# Altium PCB 8x8.PcbDoc
Units mm, origin at the board's own origin, x right, y up, seen from the top; angles counter-clockwise.
Board outline 77 x 77 mm, 2 copper layers (Top Layer, Bottom Layer); 164 components, 209 nets, 584 pads, 0 vias.
Unrouted connection lines stored in the file: 383.
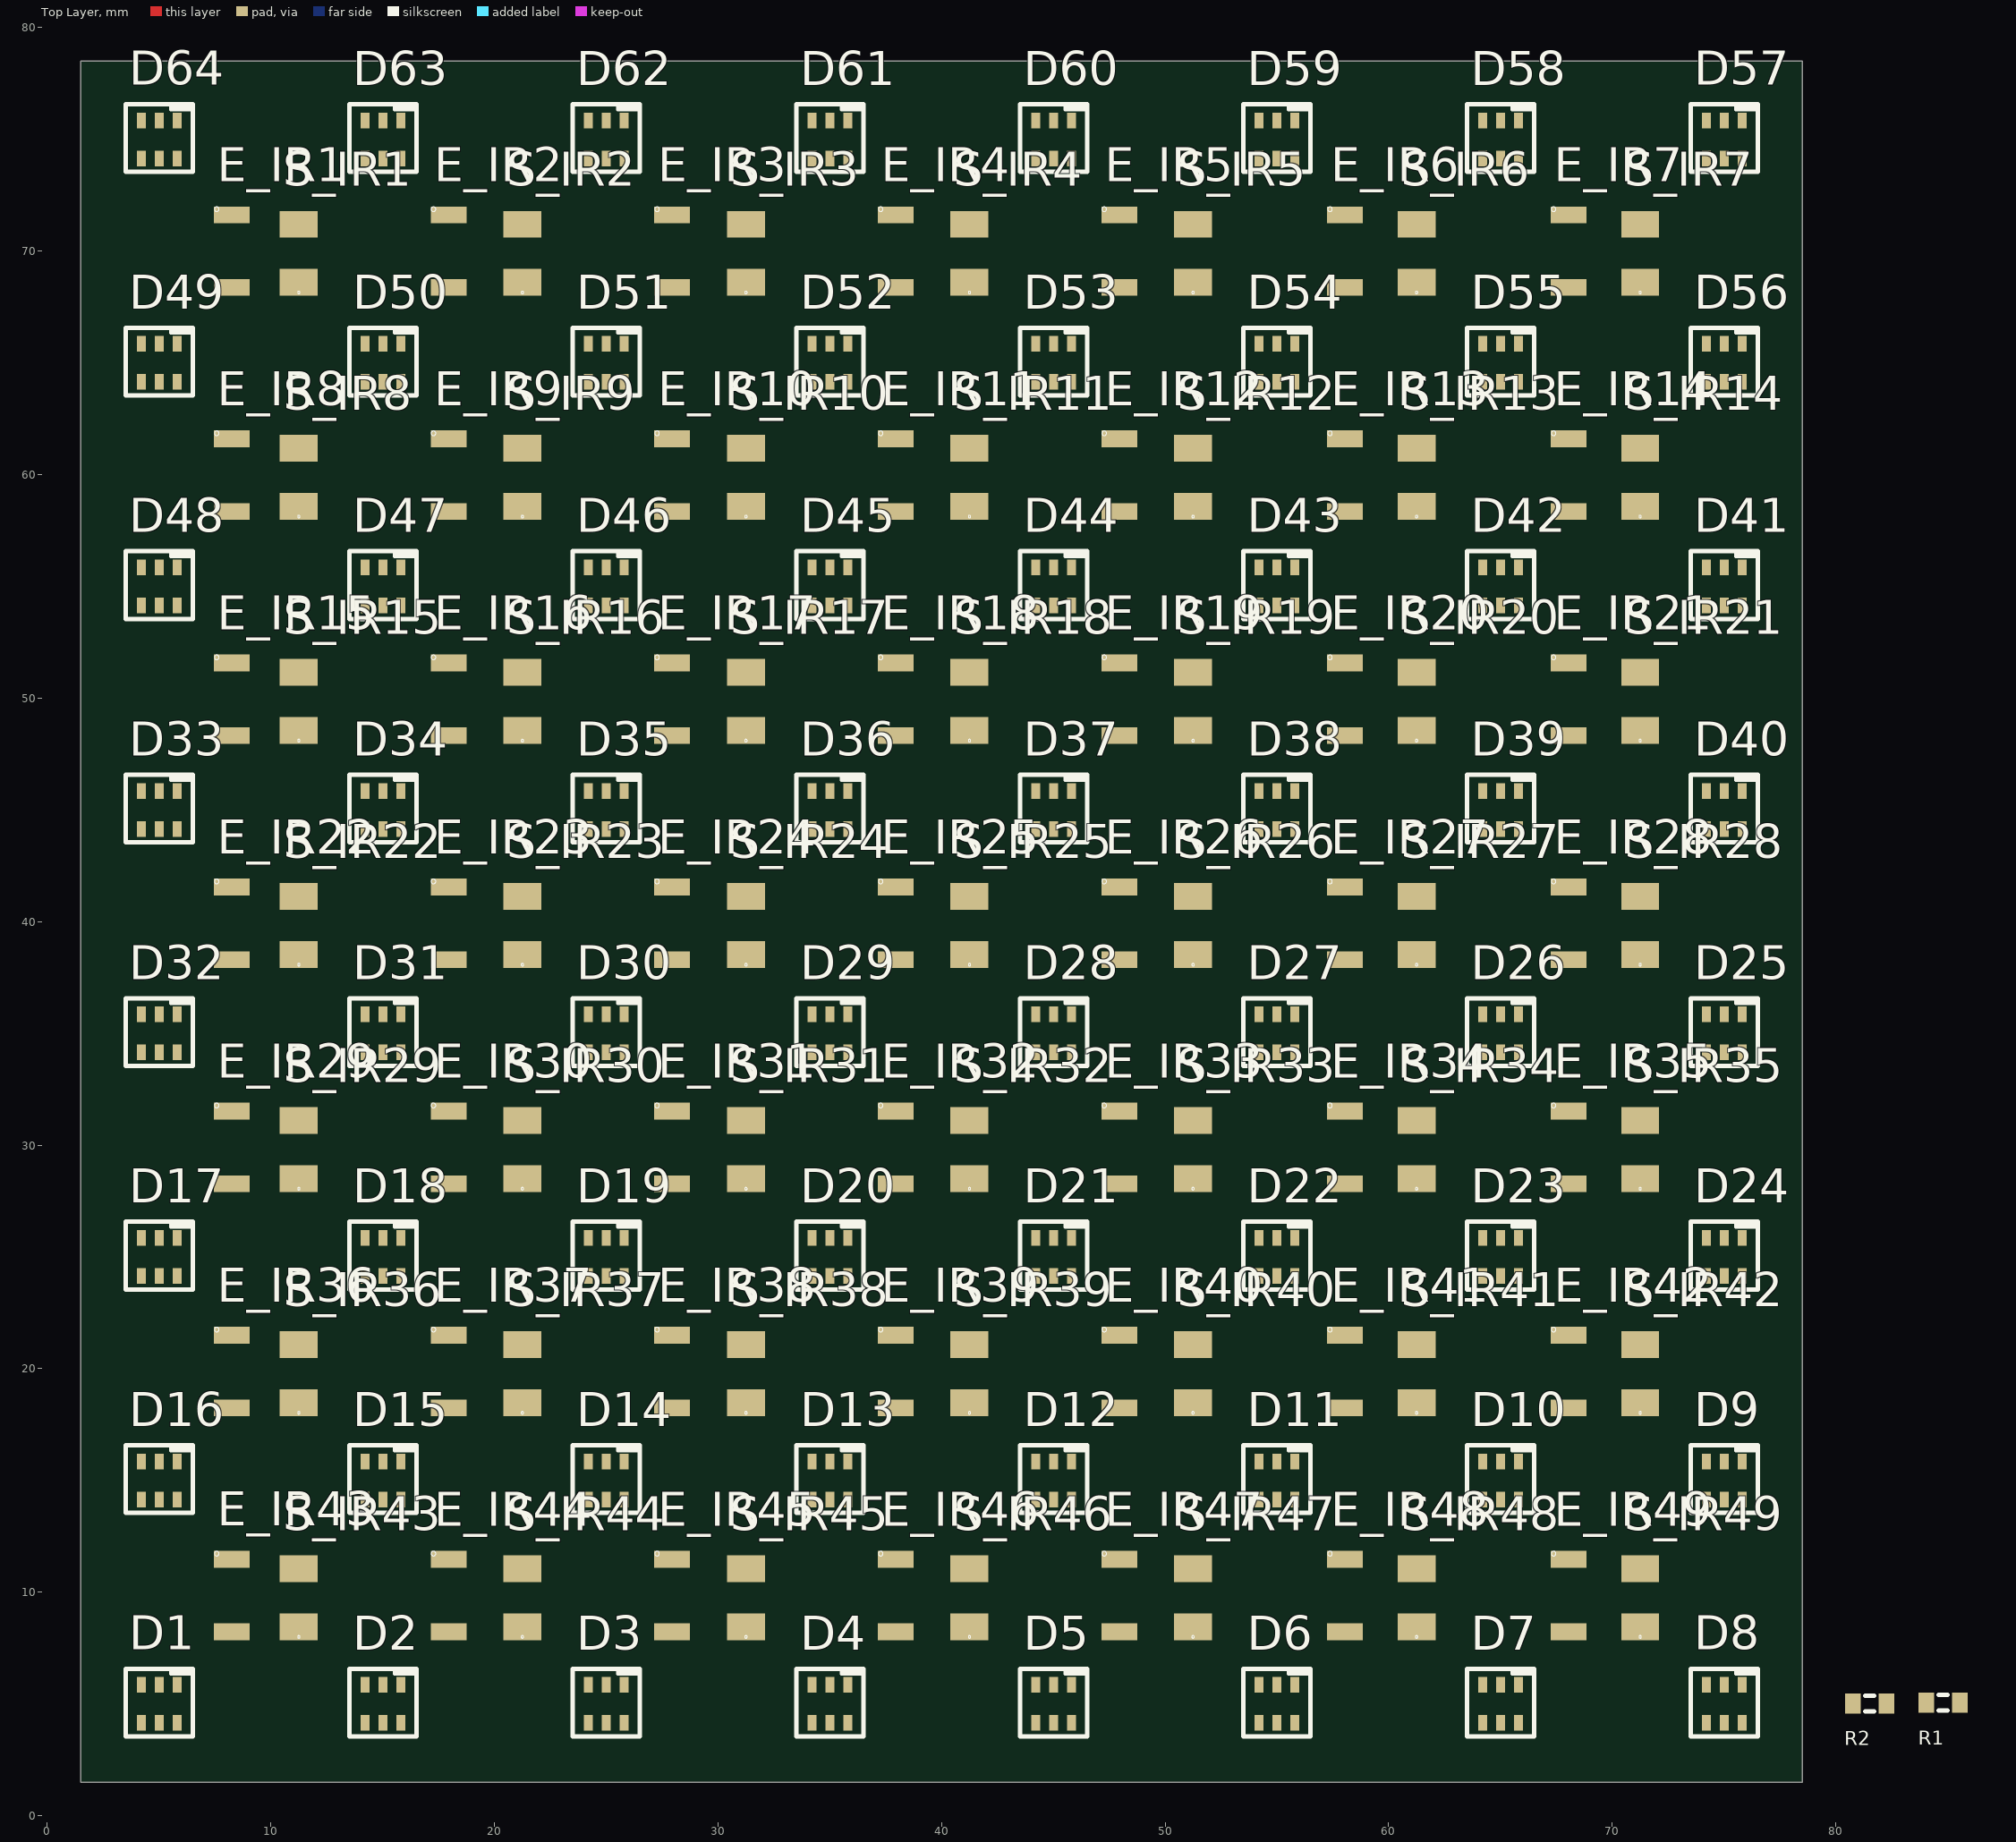
[diagram p0: Top Layer view]
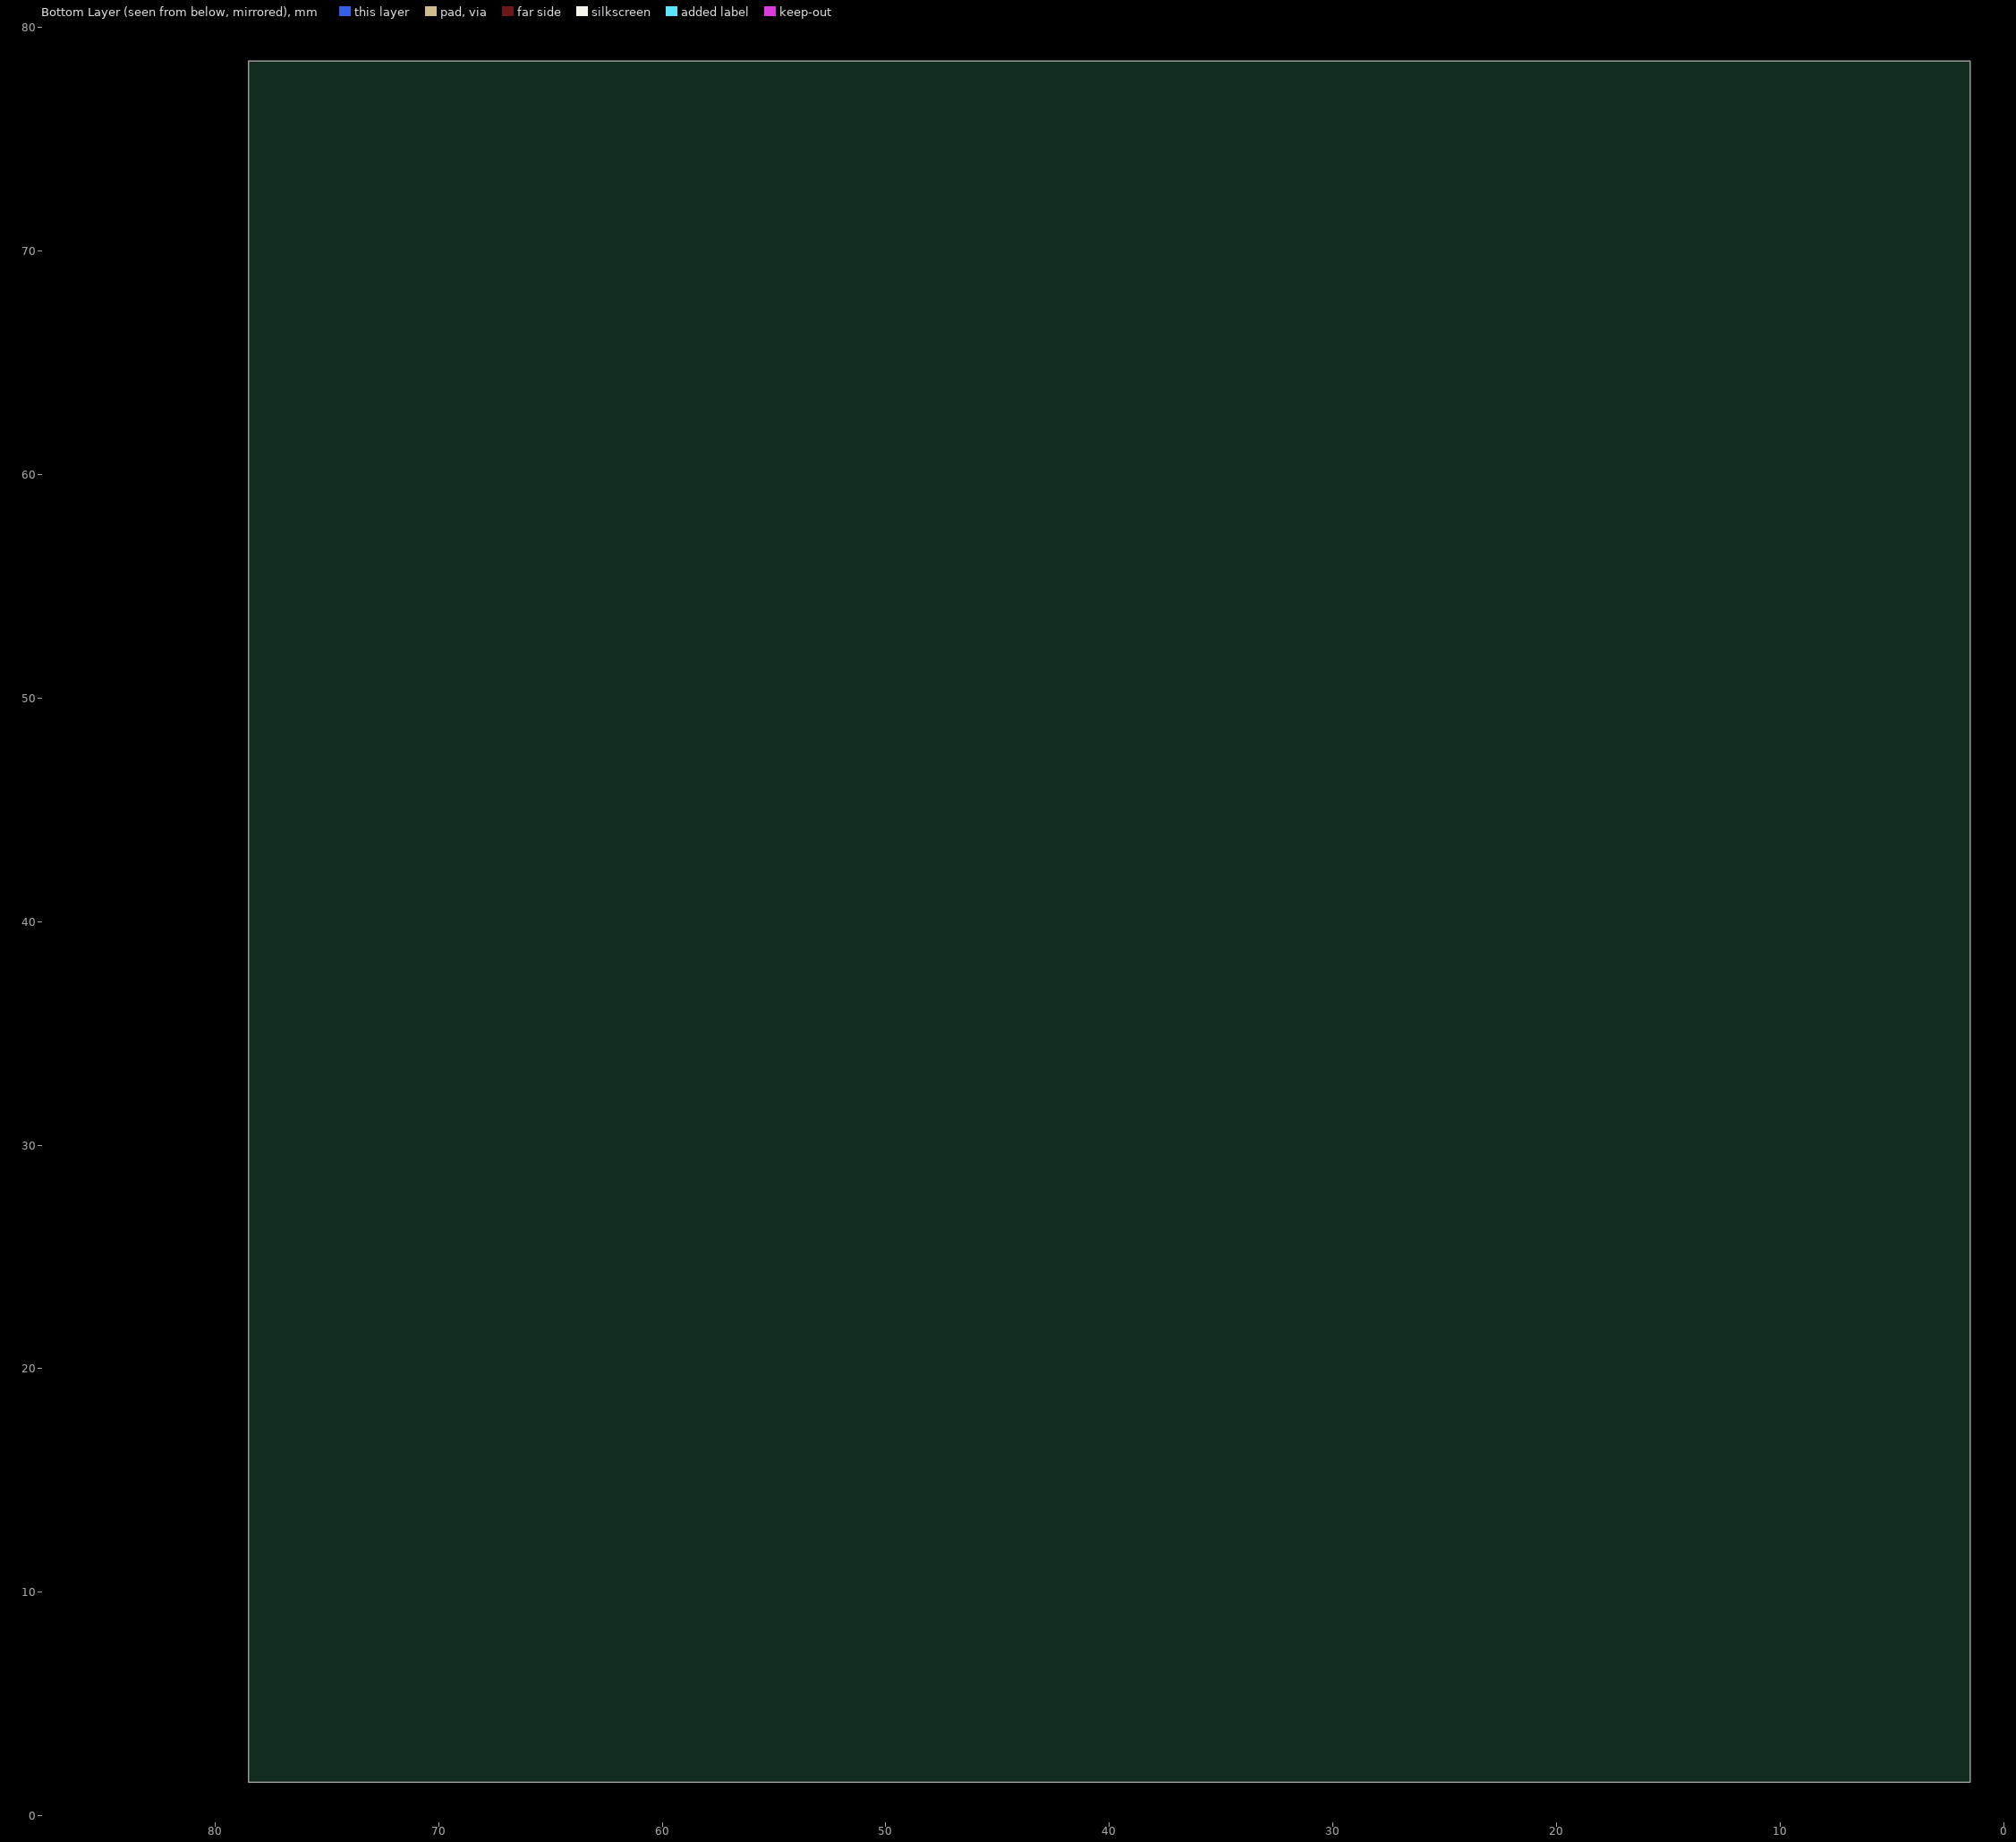
[diagram p1: Bottom Layer view, seen from below]

## Layer stack, top to bottom
Top Solder: solder mask 0.0102, Solder Resist, Dk 3.5
Top Layer: signal copper 0.0356
Dielectric 1: dielectric 0.32, FR-4, Dk 4.8
Bottom Layer: signal copper 0.0356
Bottom Solder: solder mask 0.0102, Solder Resist, Dk 3.5

## Board outline
1.5,1.5 78.5,1.5 78.5,78.5 1.5,78.5

## Design rules (kind name [scope] priority, off if disabled: settings)
Clearance [All] p1: gap=0.254
PolygonConnect [All] p1: connectstyle=Relief reliefconductorwidth=0.254 reliefentries=4 polygonreliefangle="90 Angle" airgapwidth=0.254
RoomDefinition 8x8 [InComponentClass('8x8')] p1: confinementstyle=ConfineIn formatcopy=TRUE lockcomponents=FALSE outline 153.443,1.424 1466.496,1.424 1466.496,8.79 153.443,8.79
RoutingVias [All] p1: holewidth=0.711 width=1.27 viastyle="Through Hole" minholewidth=0.711 minwidth=1.27 maxholewidth=0.711 maxwidth=1.27
SolderMaskExpansion [All] p1: expansion=0.102
Width [All] p1: maxlimit=0.254 minlimit=0.254 preferedwidth=0.254
30 further rules are at their usual default settings.

## Components (designator, comment, footprint, x,y, rotation, side; value= is the part's Value field where it differs from the comment)
D1 "APA102-2020" APA102-2020 5,5 r0 top
D2 "APA102-2020" APA102-2020 15,5 r0 top
D3 "APA102-2020" APA102-2020 25,5 r0 top
D4 "APA102-2020" APA102-2020 35,5 r0 top
D5 "APA102-2020" APA102-2020 45,5 r0 top
D6 "APA102-2020" APA102-2020 55,5 r0 top
D7 "APA102-2020" APA102-2020 65,5 r0 top
D8 "APA102-2020" APA102-2020 75,5 r0 top
D9 "APA102-2020" APA102-2020 75,15 r0 top
D10 "APA102-2020" APA102-2020 65,15 r0 top
D11 "APA102-2020" APA102-2020 55,15 r0 top
D12 "APA102-2020" APA102-2020 45,15 r0 top
D13 "APA102-2020" APA102-2020 35,15 r0 top
D14 "APA102-2020" APA102-2020 25,15 r0 top
D15 "APA102-2020" APA102-2020 15,15 r0 top
D16 "APA102-2020" APA102-2020 5,15 r0 top
D17 "APA102-2020" APA102-2020 5,25 r0 top
D18 "APA102-2020" APA102-2020 15,25 r0 top
D19 "APA102-2020" APA102-2020 25,25 r0 top
D20 "APA102-2020" APA102-2020 35,25 r0 top
D21 "APA102-2020" APA102-2020 45,25 r0 top
D22 "APA102-2020" APA102-2020 55,25 r0 top
D23 "APA102-2020" APA102-2020 65,25 r0 top
D24 "APA102-2020" APA102-2020 75,25 r0 top
D25 "APA102-2020" APA102-2020 75,35 r0 top
D26 "APA102-2020" APA102-2020 65,35 r0 top
D27 "APA102-2020" APA102-2020 55,35 r0 top
D28 "APA102-2020" APA102-2020 45,35 r0 top
D29 "APA102-2020" APA102-2020 35,35 r0 top
D30 "APA102-2020" APA102-2020 25,35 r0 top
D31 "APA102-2020" APA102-2020 15,35 r0 top
D32 "APA102-2020" APA102-2020 5,35 r0 top
D33 "APA102-2020" APA102-2020 5,45 r0 top
D34 "APA102-2020" APA102-2020 15,45 r0 top
D35 "APA102-2020" APA102-2020 25,45 r0 top
D36 "APA102-2020" APA102-2020 35,45 r0 top
D37 "APA102-2020" APA102-2020 45,45 r0 top
D38 "APA102-2020" APA102-2020 55,45 r0 top
D39 "APA102-2020" APA102-2020 65,45 r0 top
D40 "APA102-2020" APA102-2020 75,45 r0 top
D41 "APA102-2020" APA102-2020 75,55 r0 top
D42 "APA102-2020" APA102-2020 65,55 r0 top
D43 "APA102-2020" APA102-2020 55,55 r0 top
D44 "APA102-2020" APA102-2020 45,55 r0 top
D45 "APA102-2020" APA102-2020 35,55 r0 top
D46 "APA102-2020" APA102-2020 25,55 r0 top
D47 "APA102-2020" APA102-2020 15,55 r0 top
D48 "APA102-2020" APA102-2020 5,55 r0 top
D49 "APA102-2020" APA102-2020 5,65 r0 top
D50 "APA102-2020" APA102-2020 15,65 r0 top
D51 "APA102-2020" APA102-2020 25,65 r0 top
D52 "APA102-2020" APA102-2020 35,65 r0 top
D53 "APA102-2020" APA102-2020 45,65 r0 top
D54 "APA102-2020" APA102-2020 55,65 r0 top
D55 "APA102-2020" APA102-2020 65,65 r0 top
D56 "APA102-2020" APA102-2020 75,65 r0 top
D57 "APA102-2020" APA102-2020 75,75 r0 top
D58 "APA102-2020" APA102-2020 65,75 r0 top
D59 "APA102-2020" APA102-2020 55,75 r0 top
D60 "APA102-2020" APA102-2020 45,75 r0 top
D61 "APA102-2020" APA102-2020 35,75 r0 top
D62 "APA102-2020" APA102-2020 25,75 r0 top
D63 "APA102-2020" APA102-2020 15,75 r0 top
D64 "APA102-2020" APA102-2020 5,75 r0 top
E_IR1 "IR26-21C" E_IR 8.25,70 r90 top
E_IR2 "IR26-21C" E_IR 17.95,70 r90 top
E_IR3 "IR26-21C" E_IR 27.95,70 r90 top
E_IR4 "IR26-21C" E_IR 37.95,70 r90 top
E_IR5 "IR26-21C" E_IR 47.95,70 r90 top
E_IR6 "IR26-21C" E_IR 58.05,70 r90 top
E_IR7 "IR26-21C" E_IR 68.05,70 r90 top
E_IR8 "IR26-21C" E_IR 8.25,59.975 r90 top
E_IR9 "IR26-21C" E_IR 17.95,59.975 r90 top
E_IR10 "IR26-21C" E_IR 27.95,59.975 r90 top
E_IR11 "IR26-21C" E_IR 37.95,59.975 r90 top
E_IR12 "IR26-21C" E_IR 47.95,59.975 r90 top
E_IR13 "IR26-21C" E_IR 58.05,59.975 r90 top
E_IR14 "IR26-21C" E_IR 68.05,59.975 r90 top
E_IR15 "IR26-21C" E_IR 8.25,49.95 r90 top
E_IR16 "IR26-21C" E_IR 17.95,49.95 r90 top
E_IR17 "IR26-21C" E_IR 27.95,49.95 r90 top
E_IR18 "IR26-21C" E_IR 37.95,49.95 r90 top
E_IR19 "IR26-21C" E_IR 47.95,49.95 r90 top
E_IR20 "IR26-21C" E_IR 58.05,49.95 r90 top
E_IR21 "IR26-21C" E_IR 68.05,49.95 r90 top
E_IR22 "IR26-21C" E_IR 8.25,39.925 r90 top
E_IR23 "IR26-21C" E_IR 17.95,39.925 r90 top
E_IR24 "IR26-21C" E_IR 27.95,39.925 r90 top
E_IR25 "IR26-21C" E_IR 37.95,39.925 r90 top
E_IR26 "IR26-21C" E_IR 47.95,39.925 r90 top
E_IR27 "IR26-21C" E_IR 58.05,39.925 r90 top
E_IR28 "IR26-21C" E_IR 68.05,39.925 r90 top
E_IR29 "IR26-21C" E_IR 8.25,29.9 r90 top
E_IR30 "IR26-21C" E_IR 17.95,29.9 r90 top
E_IR31 "IR26-21C" E_IR 27.95,29.9 r90 top
E_IR32 "IR26-21C" E_IR 37.95,29.9 r90 top
E_IR33 "IR26-21C" E_IR 47.95,29.9 r90 top
E_IR34 "IR26-21C" E_IR 58.05,29.9 r90 top
E_IR35 "IR26-21C" E_IR 68.05,29.9 r90 top
E_IR36 "IR26-21C" E_IR 8.25,19.875 r90 top
E_IR37 "IR26-21C" E_IR 17.95,19.875 r90 top
E_IR38 "IR26-21C" E_IR 27.95,19.875 r90 top
E_IR39 "IR26-21C" E_IR 37.95,19.875 r90 top
E_IR40 "IR26-21C" E_IR 47.95,19.875 r90 top
E_IR41 "IR26-21C" E_IR 58.05,19.875 r90 top
E_IR42 "IR26-21C" E_IR 68.05,19.875 r90 top
E_IR43 "IR26-21C" E_IR 8.25,9.85 r90 top
E_IR44 "IR26-21C" E_IR 17.95,9.85 r90 top
E_IR45 "IR26-21C" E_IR 27.95,9.85 r90 top
E_IR46 "IR26-21C" E_IR 37.95,9.85 r90 top
E_IR47 "IR26-21C" E_IR 47.95,9.85 r90 top
E_IR48 "IR26-21C" E_IR 58.05,9.85 r90 top
E_IR49 "IR26-21C" E_IR 68.05,9.85 r90 top
R1 "Res3" J1-0603 84.805,5.051 r0 top
R2 "Res3" J1-0603 81.525,5.025 r0 top
S_IR1 "PT15-21B" S_IR 11.25,69.9 r90 top
S_IR2 "PT15-21B" S_IR 21.25,69.9 r90 top
S_IR3 "PT15-21B" S_IR 31.25,69.9 r90 top
S_IR4 "PT15-21B" S_IR 41.25,69.9 r90 top
S_IR5 "PT15-21B" S_IR 51.25,69.9 r90 top
S_IR6 "PT15-21B" S_IR 61.25,69.9 r90 top
S_IR7 "PT15-21B" S_IR 71.25,69.9 r90 top
S_IR8 "PT15-21B" S_IR 11.25,59.875 r90 top
S_IR9 "PT15-21B" S_IR 21.25,59.875 r90 top
S_IR10 "PT15-21B" S_IR 31.25,59.875 r90 top
S_IR11 "PT15-21B" S_IR 41.25,59.875 r90 top
S_IR12 "PT15-21B" S_IR 51.25,59.875 r90 top
S_IR13 "PT15-21B" S_IR 61.25,59.875 r90 top
S_IR14 "PT15-21B" S_IR 71.25,59.875 r90 top
S_IR15 "PT15-21B" S_IR 11.25,49.85 r90 top
S_IR16 "PT15-21B" S_IR 21.25,49.85 r90 top
S_IR17 "PT15-21B" S_IR 31.25,49.85 r90 top
S_IR18 "PT15-21B" S_IR 41.25,49.85 r90 top
S_IR19 "PT15-21B" S_IR 51.25,49.85 r90 top
S_IR20 "PT15-21B" S_IR 61.25,49.85 r90 top
S_IR21 "PT15-21B" S_IR 71.25,49.85 r90 top
S_IR22 "PT15-21B" S_IR 11.25,39.825 r90 top
S_IR23 "PT15-21B" S_IR 21.25,39.825 r90 top
S_IR24 "PT15-21B" S_IR 31.25,39.825 r90 top
S_IR25 "PT15-21B" S_IR 41.25,39.825 r90 top
S_IR26 "PT15-21B" S_IR 51.25,39.825 r90 top
S_IR27 "PT15-21B" S_IR 61.25,39.825 r90 top
S_IR28 "PT15-21B" S_IR 71.25,39.825 r90 top
S_IR29 "PT15-21B" S_IR 11.25,29.8 r90 top
S_IR30 "PT15-21B" S_IR 21.25,29.8 r90 top
S_IR31 "PT15-21B" S_IR 31.25,29.8 r90 top
S_IR32 "PT15-21B" S_IR 41.25,29.8 r90 top
S_IR33 "PT15-21B" S_IR 51.25,29.8 r90 top
S_IR34 "PT15-21B" S_IR 61.25,29.8 r90 top
S_IR35 "PT15-21B" S_IR 71.25,29.8 r90 top
S_IR36 "PT15-21B" S_IR 11.25,19.775 r90 top
S_IR37 "PT15-21B" S_IR 21.25,19.775 r90 top
S_IR38 "PT15-21B" S_IR 31.25,19.775 r90 top
S_IR39 "PT15-21B" S_IR 41.25,19.775 r90 top
S_IR40 "PT15-21B" S_IR 51.25,19.775 r90 top
S_IR41 "PT15-21B" S_IR 61.25,19.775 r90 top
S_IR42 "PT15-21B" S_IR 71.25,19.775 r90 top
S_IR43 "PT15-21B" S_IR 11.25,9.75 r90 top
S_IR44 "PT15-21B" S_IR 21.25,9.75 r90 top
S_IR45 "PT15-21B" S_IR 31.25,9.75 r90 top
S_IR46 "PT15-21B" S_IR 41.25,9.75 r90 top
S_IR47 "PT15-21B" S_IR 51.25,9.75 r90 top
S_IR48 "PT15-21B" S_IR 61.25,9.75 r90 top
S_IR49 "PT15-21B" S_IR 71.25,9.75 r90 top

## Footprints (in the part's own frame and the unit in brackets; to place one, negate y for a bottom-side part, rotate by r counter-clockwise, add the part's x,y. Pads: shape width x height; smd on the part's side, far side on the other; paste and mask are expansions set on the pad)
APA102-2020 [mm]
  rect 0.4x0.7 smd: CKI(-0.791,-0.852) CKO(0.808,-0.852) GND(0.009,0.848) SDI(-0.791,0.848) SDO(0.808,0.848) VDD(0.009,-0.852)
  silkscreen extent -1.49,-1.45 1.51,1.58
E_IR [mm]
  rect 0.75x1.6 smd: 1(1.625,0) 2(-1.625,0)
  silkscreen extent 1.77,0.57 1.98,0.78
J1-0603 [mm] "Chip Resistor, Body 1.6x0.8mm, IPC High Density"
  rect 0.7x0.9 smd: 1(-0.75,0) 2(0.75,0)
  silkscreen extent -0.2,-0.35 0.2,0.35, body extent -0.85,-0.48 0.85,0.48, height 0.9
S_IR [mm]
  rect 1.2x1.7 smd: 1(1.3,0) 2(-1.3,0)
  silkscreen extent -1.81,-0.06 -1.69,0.06

## Part data
D1 D2 D3 D4 D5 D6 D7 D8 D9 D10 D11 D12 D13 D14 D15 D16 D17 D18 D19 D20 D21 D22 D23 D24 D25 D26 D27 D28 D29 D30 D31 D32 D33 D34 D35 D36 D37 D38 D39 D40 D41 D42 D43 D44 D45 D46 D47 D48 D49 D50 D51 D52 D53 D54 D55 D56 D57 D58 D59 D60 D61 D62 D63 D64: "APA102 Addressable RGB LED    Used in manufacturing of various products at SparkFun   Packages: 5050  2020     SparkFun Products: SparkFun Lumenati Boards"
R1 R2: "Resistor"

## Nets (pads, with @x,y where several pads share a name; then routed paths per layer and width w, separated by ;. In a path a pad name is that pad's centre, name@x,y a point inside that pad or via, vN(x,y) a via of type N, cw(c..) or ccw(c..) an arc to the next point about the centre after c; other vN are vias at no path point)
GND: D1.GND D2.GND D3.GND D4.GND D5.GND D6.GND D7.GND D8.GND D9.GND D10.GND D11.GND D12.GND D13.GND D14.GND D15.GND D16.GND D17.GND D18.GND D19.GND D20.GND D21.GND D22.GND D23.GND D24.GND D25.GND D26.GND D27.GND D28.GND D29.GND D30.GND D31.GND D32.GND D33.GND D34.GND D35.GND D36.GND D37.GND D38.GND D39.GND D40.GND D41.GND D42.GND D43.GND D44.GND D45.GND D46.GND D47.GND D48.GND D49.GND D50.GND D51.GND D52.GND D53.GND D54.GND D55.GND D56.GND D57.GND D58.GND D59.GND D60.GND D61.GND D62.GND D63.GND D64.GND R2.1
NetD1_CKO: D1.CKO D2.CKI
NetD1_SDO: D1.SDO D2.SDI
NetD2_CKO: D2.CKO D3.CKI
NetD2_SDO: D2.SDO D3.SDI
NetD3_CKO: D3.CKO D4.CKI
NetD3_SDO: D3.SDO D4.SDI
NetD4_CKO: D4.CKO D5.CKI
NetD4_SDO: D4.SDO D5.SDI
NetD5_CKO: D5.CKO D6.CKI
NetD5_SDO: D5.SDO D6.SDI
NetD6_CKO: D6.CKO D7.CKI
NetD6_SDO: D6.SDO D7.SDI
NetD7_CKO: D7.CKO D8.CKI
NetD7_SDO: D7.SDO D8.SDI
NetD8_CKO: D8.CKO D9.CKI
NetD8_SDO: D8.SDO D9.SDI
NetD9_CKO: D9.CKO D10.CKI
NetD9_SDO: D9.SDO D10.SDI
NetD10_CKO: D10.CKO D11.CKI
NetD10_SDO: D10.SDO D11.SDI
NetD11_CKO: D11.CKO D12.CKI
NetD11_SDO: D11.SDO D12.SDI
NetD12_CKO: D12.CKO D13.CKI
NetD12_SDO: D12.SDO D13.SDI
NetD13_CKO: D13.CKO D14.CKI
NetD13_SDO: D13.SDO D14.SDI
NetD14_CKO: D14.CKO D15.CKI
NetD14_SDO: D14.SDO D15.SDI
NetD15_CKO: D15.CKO D16.CKI
NetD15_SDO: D15.SDO D16.SDI
NetD16_CKO: D16.CKO D17.CKI
NetD16_SDO: D16.SDO D17.SDI
NetD17_CKO: D17.CKO D18.CKI
NetD17_SDO: D17.SDO D18.SDI
NetD18_CKO: D18.CKO D19.CKI
NetD18_SDO: D18.SDO D19.SDI
NetD19_CKO: D19.CKO D20.CKI
NetD19_SDO: D19.SDO D20.SDI
NetD20_CKO: D20.CKO D21.CKI
NetD20_SDO: D20.SDO D21.SDI
NetD21_CKO: D21.CKO D22.CKI
NetD21_SDO: D21.SDO D22.SDI
NetD22_CKO: D22.CKO D23.CKI
NetD22_SDO: D22.SDO D23.SDI
NetD23_CKO: D23.CKO D24.CKI
NetD23_SDO: D23.SDO D24.SDI
NetD24_CKO: D24.CKO D25.CKI
NetD24_SDO: D24.SDO D25.SDI
NetD25_CKO: D25.CKO D26.CKI
NetD25_SDO: D25.SDO D26.SDI
NetD26_CKO: D26.CKO D27.CKI
NetD26_SDO: D26.SDO D27.SDI
NetD27_CKO: D27.CKO D28.CKI
NetD27_SDO: D27.SDO D28.SDI
NetD28_CKO: D28.CKO D29.CKI
NetD28_SDO: D28.SDO D29.SDI
NetD29_CKO: D29.CKO D30.CKI
NetD29_SDO: D29.SDO D30.SDI
NetD30_CKO: D30.CKO D31.CKI
NetD30_SDO: D30.SDO D31.SDI
NetD31_CKO: D31.CKO D32.CKI
NetD31_SDO: D31.SDO D32.SDI
NetD33_CKO: D33.CKO D34.CKI
NetD33_SDO: D33.SDO D34.SDI
NetD33_VDD: D33.VDD D34.VDD D35.VDD D36.VDD D37.VDD D38.VDD D39.VDD D40.VDD
NetD34_CKO: D34.CKO D35.CKI
NetD34_SDO: D34.SDO D35.SDI
NetD35_CKO: D35.CKO D36.CKI
NetD35_SDO: D35.SDO D36.SDI
NetD36_CKO: D36.CKO D37.CKI
NetD36_SDO: D36.SDO D37.SDI
NetD37_CKO: D37.CKO D38.CKI
NetD37_SDO: D37.SDO D38.SDI
NetD38_CKO: D38.CKO D39.CKI
NetD38_SDO: D38.SDO D39.SDI
NetD39_CKO: D39.CKO D40.CKI
NetD39_SDO: D39.SDO D40.SDI
NetD40_CKO: D40.CKO D41.CKI
NetD40_SDO: D40.SDO D41.SDI
NetD41_CKO: D41.CKO D42.CKI
NetD41_SDO: D41.SDO D42.SDI
NetD42_CKO: D42.CKO D43.CKI
NetD42_SDO: D42.SDO D43.SDI
NetD43_CKO: D43.CKO D44.CKI
NetD43_SDO: D43.SDO D44.SDI
NetD44_CKO: D44.CKO D45.CKI
NetD44_SDO: D44.SDO D45.SDI
NetD45_CKO: D45.CKO D46.CKI
NetD45_SDO: D45.SDO D46.SDI
NetD46_CKO: D46.CKO D47.CKI
NetD46_SDO: D46.SDO D47.SDI
NetD47_CKO: D47.CKO D48.CKI
NetD47_SDO: D47.SDO D48.SDI
NetD48_CKO: D48.CKO D49.CKI
NetD48_SDO: D48.SDO D49.SDI
NetD49_CKO: D49.CKO D50.CKI
NetD49_SDO: D49.SDO D50.SDI
NetD50_CKO: D50.CKO D51.CKI
NetD50_SDO: D50.SDO D51.SDI
NetD51_CKO: D51.CKO D52.CKI
NetD51_SDO: D51.SDO D52.SDI
NetD52_CKO: D52.CKO D53.CKI
NetD52_SDO: D52.SDO D53.SDI
NetD53_CKO: D53.CKO D54.CKI
NetD53_SDO: D53.SDO D54.SDI
NetD54_CKO: D54.CKO D55.CKI
NetD54_SDO: D54.SDO D55.SDI
NetD55_CKO: D55.CKO D56.CKI
NetD55_SDO: D55.SDO D56.SDI
NetD56_CKO: D56.CKO D57.CKI
NetD56_SDO: D56.SDO D57.SDI
NetD57_CKO: D57.CKO D58.CKI
NetD57_SDO: D57.SDO D58.SDI
NetD58_CKO: D58.CKO D59.CKI
NetD58_SDO: D58.SDO D59.SDI
NetD59_CKO: D59.CKO D60.CKI
NetD59_SDO: D59.SDO D60.SDI
NetD61_CKO: D61.CKO D62.CKI
NetD61_SDO: D61.SDO D62.SDI
NetD62_CKO: D62.CKO D63.CKI
NetD62_SDO: D62.SDO D63.SDI
NetD63_CKO: D63.CKO D64.CKI
NetD63_SDO: D63.SDO D64.SDI
NetE_IR1_1: E_IR1.1 R1.2
NetE_IR2_1: E_IR2.1
NetE_IR3_1: E_IR3.1
NetE_IR4_1: E_IR4.1
NetE_IR5_1: E_IR5.1
NetE_IR6_1: E_IR6.1
NetE_IR7_1: E_IR7.1
NetE_IR8_1: E_IR8.1
NetE_IR9_1: E_IR9.1
NetE_IR10_1: E_IR10.1
NetE_IR11_1: E_IR11.1
NetE_IR12_1: E_IR12.1
NetE_IR13_1: E_IR13.1
NetE_IR14_1: E_IR14.1
NetE_IR15_1: E_IR15.1
NetE_IR16_1: E_IR16.1
NetE_IR17_1: E_IR17.1
NetE_IR18_1: E_IR18.1
NetE_IR19_1: E_IR19.1
NetE_IR20_1: E_IR20.1
NetE_IR21_1: E_IR21.1
NetE_IR22_1: E_IR22.1
NetE_IR23_1: E_IR23.1
NetE_IR24_1: E_IR24.1
NetE_IR25_1: E_IR25.1
NetE_IR26_1: E_IR26.1
NetE_IR27_1: E_IR27.1
NetE_IR28_1: E_IR28.1
NetE_IR29_1: E_IR29.1
NetE_IR30_1: E_IR30.1
NetE_IR31_1: E_IR31.1
NetE_IR32_1: E_IR32.1
NetE_IR33_1: E_IR33.1
NetE_IR34_1: E_IR34.1
NetE_IR35_1: E_IR35.1
NetE_IR36_1: E_IR36.1
NetE_IR37_1: E_IR37.1
NetE_IR38_1: E_IR38.1
NetE_IR39_1: E_IR39.1
NetE_IR40_1: E_IR40.1
NetE_IR41_1: E_IR41.1
NetE_IR42_1: E_IR42.1
NetE_IR43_1: E_IR43.1
NetE_IR44_1: E_IR44.1
NetE_IR45_1: E_IR45.1
NetE_IR46_1: E_IR46.1
NetE_IR47_1: E_IR47.1
NetE_IR48_1: E_IR48.1
NetE_IR49_1: E_IR49.1
NetIC1_1: 
NetIC1_2: 
NetIC1_5: 
NetIC1_12: 
NetIC1_13: 
NetIC1_14: 
NetIC1_15: 
NetIC2_1: 
NetIC2_2: 
NetIC2_5: 
NetIC2_12: 
NetIC2_13: 
NetIC2_14: 
NetIC2_15: 
NetQ8_3: 
NetQ9_3: 
NetQ10_3: R1.1
NetQ11_3: 
NetQ12_3: 
NetQ13_3: 
NetQ14_3: 
NetR6_2: S_IR3.1 S_IR10.1 S_IR17.1 S_IR24.1 S_IR31.1 S_IR38.1 S_IR45.1
NetR8_2: S_IR4.1 S_IR11.1 S_IR18.1 S_IR25.1 S_IR32.1 S_IR39.1 S_IR46.1
NetR10_2: S_IR5.1 S_IR12.1 S_IR19.1 S_IR26.1 S_IR33.1 S_IR40.1 S_IR47.1
NetR12_2: S_IR6.1 S_IR13.1 S_IR20.1 S_IR27.1 S_IR34.1 S_IR41.1 S_IR48.1
ROW1: E_IR1.2 E_IR2.2 E_IR3.2 E_IR4.2 E_IR5.2 E_IR6.2 E_IR7.2 S_IR1.2 S_IR2.2 S_IR3.2 S_IR4.2 S_IR5.2 S_IR6.2 S_IR7.2
ROW2: E_IR8.2 E_IR9.2 E_IR10.2 E_IR11.2 E_IR12.2 E_IR13.2 E_IR14.2 S_IR8.2 S_IR9.2 S_IR10.2 S_IR11.2 S_IR12.2 S_IR13.2 S_IR14.2
ROW3: E_IR15.2 E_IR16.2 E_IR17.2 E_IR18.2 E_IR19.2 E_IR20.2 E_IR21.2 S_IR15.2 S_IR16.2 S_IR17.2 S_IR18.2 S_IR19.2 S_IR20.2 S_IR21.2
ROW4: E_IR22.2 E_IR23.2 E_IR24.2 E_IR25.2 E_IR26.2 E_IR27.2 E_IR28.2 S_IR22.2 S_IR23.2 S_IR24.2 S_IR25.2 S_IR26.2 S_IR27.2 S_IR28.2
ROW5: E_IR29.2 E_IR30.2 E_IR31.2 E_IR32.2 E_IR33.2 E_IR34.2 E_IR35.2 S_IR29.2 S_IR30.2 S_IR31.2 S_IR32.2 S_IR33.2 S_IR34.2 S_IR35.2
ROW6: E_IR36.2 E_IR37.2 E_IR38.2 E_IR39.2 E_IR40.2 E_IR41.2 E_IR42.2 S_IR36.2 S_IR37.2 S_IR38.2 S_IR39.2 S_IR40.2 S_IR41.2 S_IR42.2
ROW7: E_IR43.2 E_IR44.2 E_IR45.2 E_IR46.2 E_IR47.2 E_IR48.2 E_IR49.2 S_IR43.2 S_IR44.2 S_IR45.2 S_IR46.2 S_IR47.2 S_IR48.2 S_IR49.2
SCOL1: R2.2 S_IR1.1 S_IR8.1 S_IR15.1 S_IR22.1 S_IR29.1 S_IR36.1 S_IR43.1
SCOL2: S_IR2.1 S_IR9.1 S_IR16.1 S_IR23.1 S_IR30.1 S_IR37.1 S_IR44.1
SCOL7: S_IR7.1 S_IR14.1 S_IR21.1 S_IR28.1 S_IR35.1 S_IR42.1 S_IR49.1
VDD: D1.VDD D2.VDD D3.VDD D4.VDD D5.VDD D6.VDD D7.VDD D8.VDD D9.VDD D10.VDD D11.VDD D12.VDD D13.VDD D14.VDD D15.VDD D16.VDD D17.VDD D18.VDD D19.VDD D20.VDD D21.VDD D22.VDD D23.VDD D24.VDD D25.VDD D26.VDD D27.VDD D28.VDD D29.VDD D30.VDD D31.VDD D32.VDD D41.VDD D42.VDD D43.VDD D44.VDD D45.VDD D46.VDD D47.VDD D48.VDD D49.VDD D50.VDD D51.VDD D52.VDD D53.VDD D54.VDD D55.VDD D56.VDD D57.VDD D58.VDD D59.VDD D60.VDD D61.VDD D62.VDD D63.VDD D64.VDD
pads on no net: D1.CKI D1.SDI D32.CKO D32.SDO D33.CKI D33.SDI D60.CKO D60.SDO D61.CKI D61.SDI D64.CKO D64.SDO